# Altium PCB PCB1.PcbDoc (part 1 of 2)
Units mil, origin at the board's own origin, x right, y up, seen from the top; angles counter-clockwise.
Board outline 6000 x 4000 mil, 2 copper layers (Top Layer, Bottom Layer); 5 components, 75 nets, 178 pads, 23 vias.
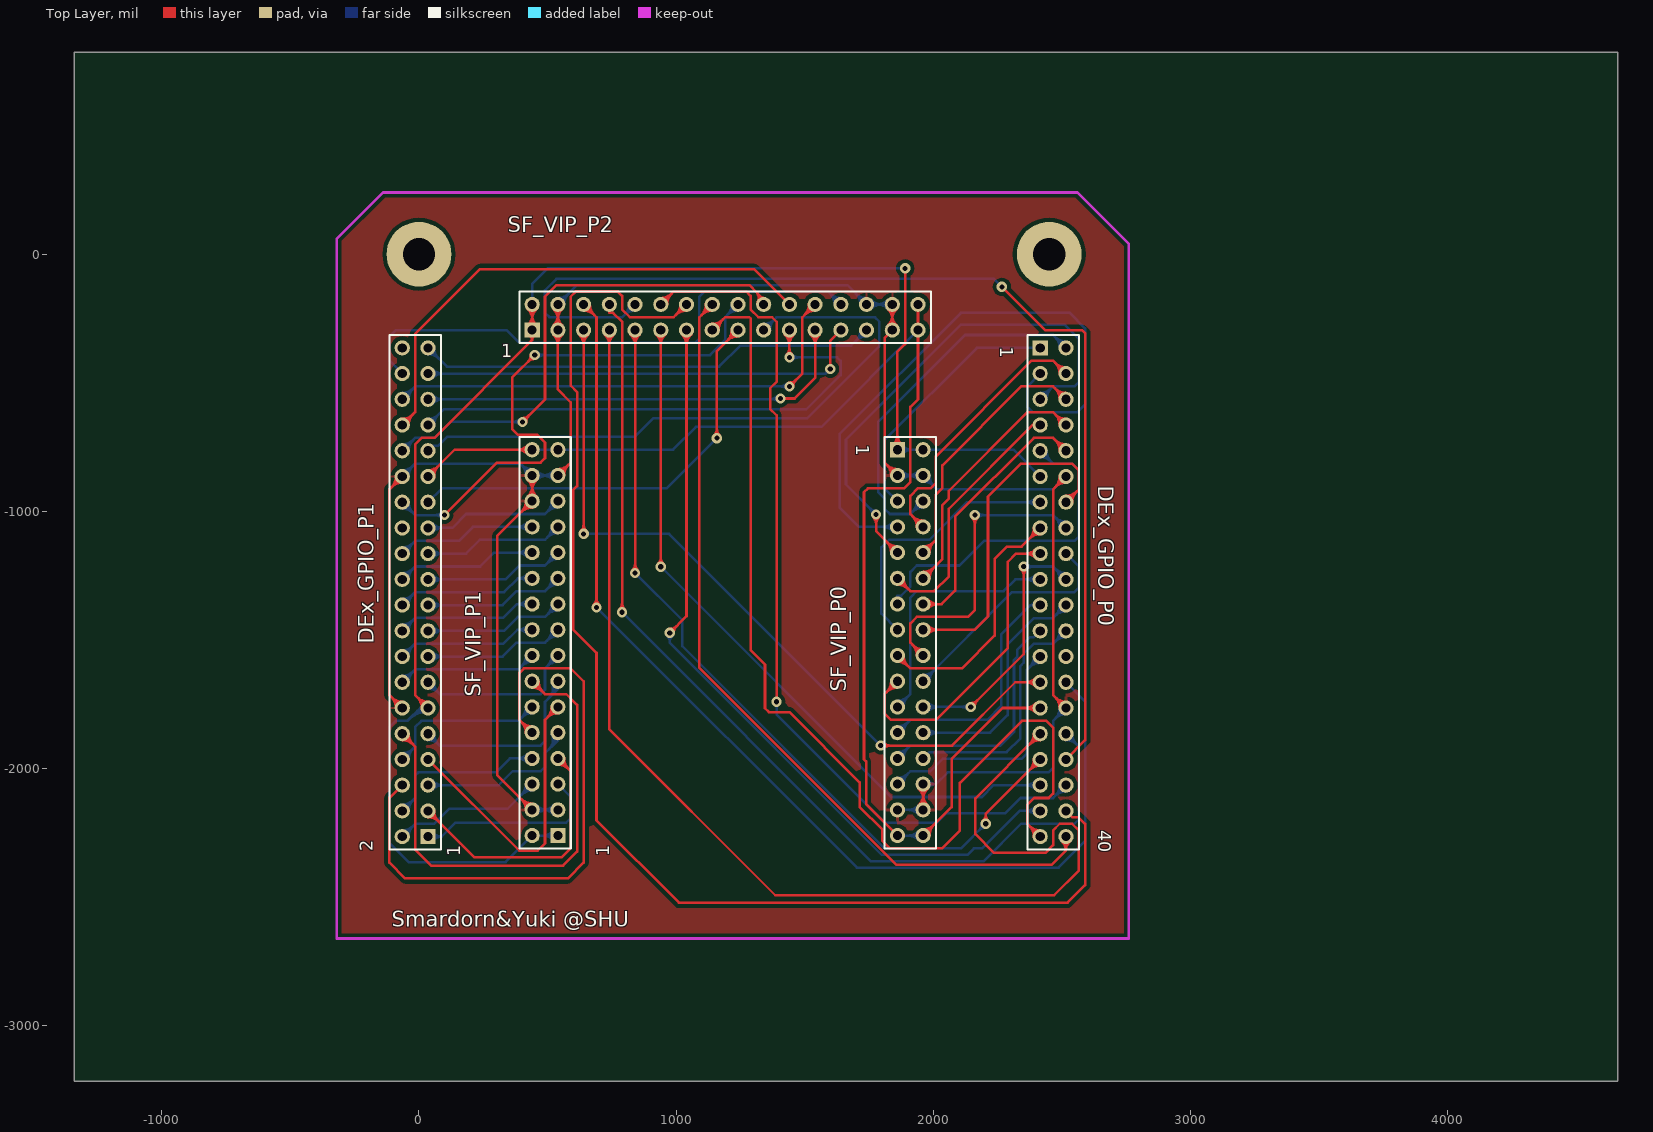
[diagram p0: Top Layer view]
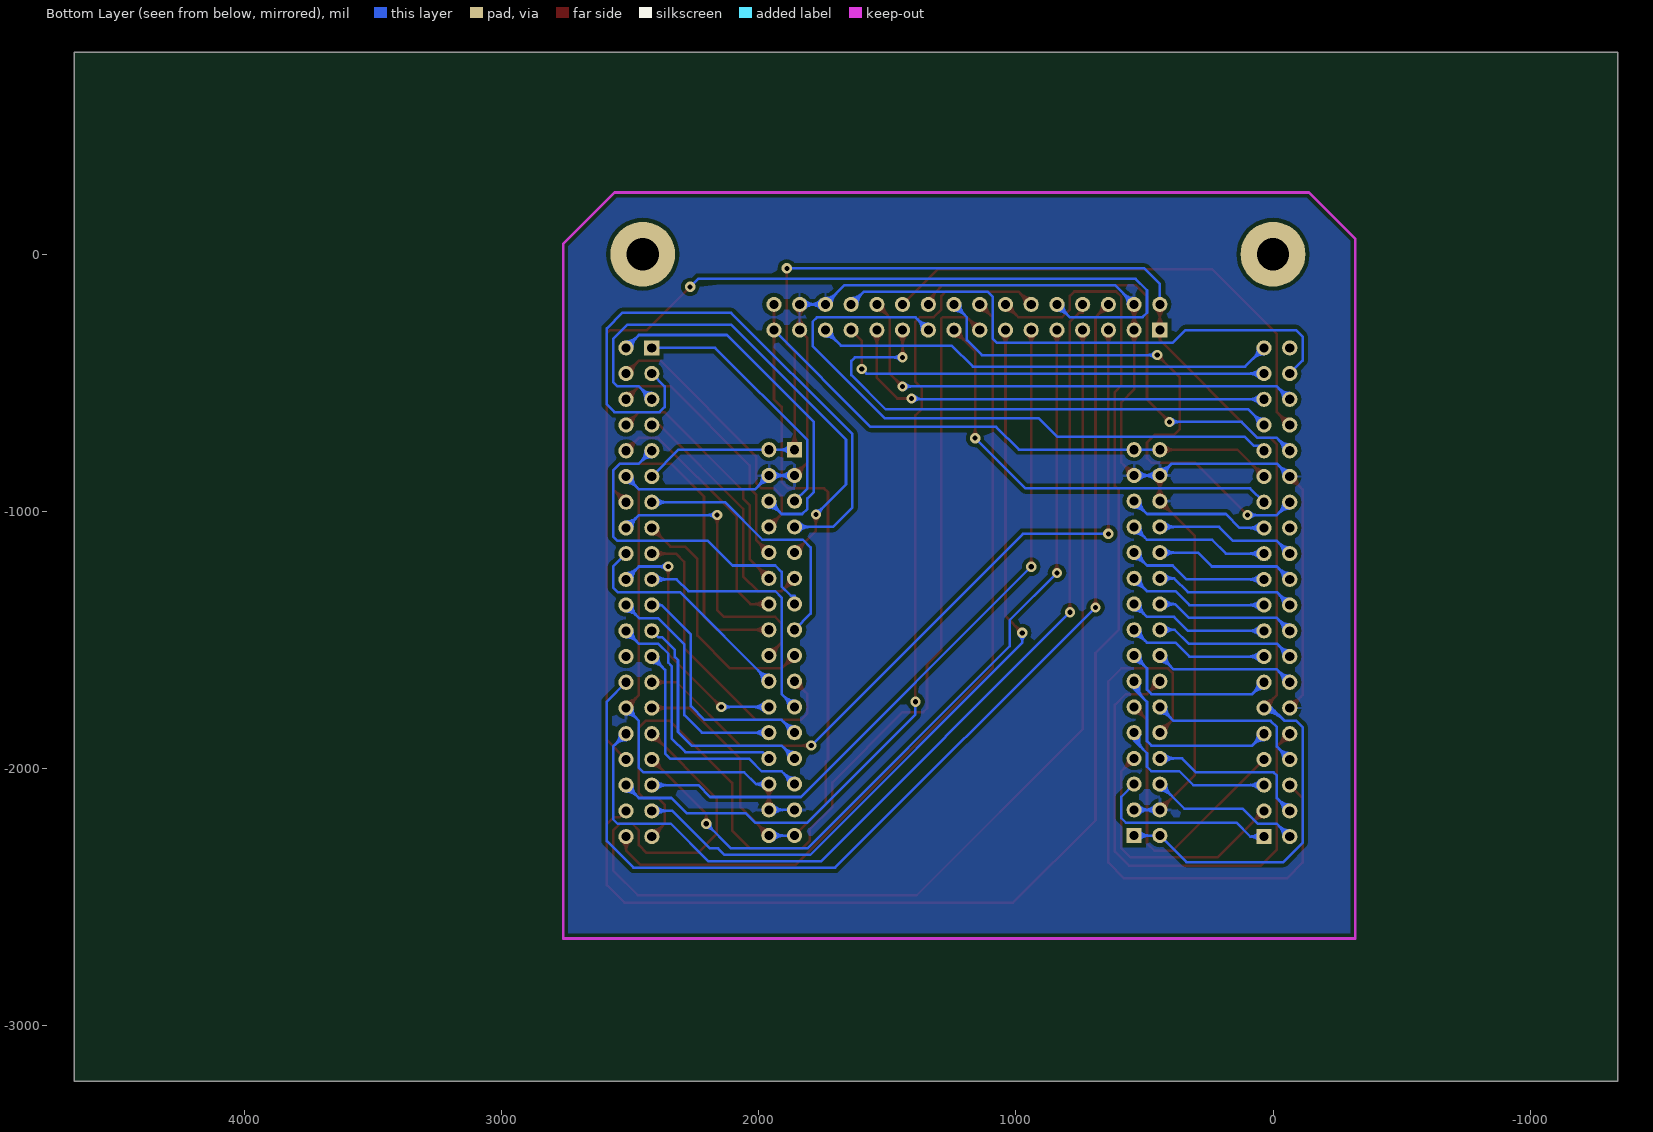
[diagram p1: Bottom Layer view, seen from below]

## Layer stack, top to bottom
Top Layer: signal copper 1.4
Dielectric: dielectric 12.6, FR-4, Dk 4.8
Bottom Layer: signal copper 1.4

## Board outline
-1340,-3215 4660,-3215 4660,785 -1340,785

## Design rules (kind name [scope] priority, off if disabled: settings)
Clearance [All] p1: gap=15
PolygonConnect [All] p1: connectstyle=Relief reliefconductorwidth=10 reliefentries=4 polygonreliefangle="90 Angle"
RoutingCorners [All] p1: cornerstyle=45-Degree minsetback=100 maxsetback=200
RoutingVias [All] p1: holewidth=20 width=40 viastyle="Through Hole" minholewidth=20 minwidth=40 maxholewidth=20 maxwidth=40
SilkscreenOverComponentPads [All] p1: minsilkscreentomaskgap=0
SolderMaskExpansion [All] p1: expansion=4
Width [All] p1: maxlimit=10 minlimit=10 preferedwidth=10
26 further rules are at their usual default settings.

## Components (designator, comment, footprint, x,y, rotation, side; value= is the part's Value field where it differs from the comment)
DEx_GPIO_P0 "Header 20X2" HDR2X20 2415,-364 r270 top locked
DEx_GPIO_P1 "Header 20X2" HDR2X20 35,-2264 r90 top locked
SF_VIP_P0 "Header 16X2" HDR2X16 1860,-760 r270 top
SF_VIP_P1 "Header 16X2" HDR2X16 540,-2260 r90 top
SF_VIP_P2 "Header 16X2" HDR2X16 440,-295 r0 top locked

## Footprints (in the part's own frame and the unit in brackets; to place one, negate y for a bottom-side part, rotate by r counter-clockwise, add the part's x,y. Pads: shape width x height; smd on the part's side, far side on the other; paste and mask are expansions set on the pad)
HDR2X16 [mm] "Connector; Header; 16x2 Position"
  rect 1.5x1.5 hole 0.9: 1(0,0)
  round 1.5 hole 0.9: 2(0,2.54) 3(2.54,0) 4(2.54,2.54) 5(5.08,0) 6(5.08,2.54) 7(7.62,0) 8(7.62,2.54) 9(10.16,0) 10(10.16,2.54) 11(12.7,0) 12(12.7,2.54) 13(15.24,0) 14(15.24,2.54) 15(17.78,0) 16(17.78,2.54) 17(20.32,0) 18(20.32,2.54) 19(22.86,0) 20(22.86,2.54) 21(25.4,0) 22(25.4,2.54) 23(27.94,0) 24(27.94,2.54) 25(30.48,0) 26(30.48,2.54) 27(33.02,0) 28(33.02,2.54) 29(35.56,0) 30(35.56,2.54) 31(38.1,0) 32(38.1,2.54)
  silkscreen extent -1.27,-1.27 39.37,3.81
HDR2X20 [mm] "Connector; Header; 20x2 Position"
  rect 1.5x1.5 hole 0.9: 1(0,0)
  round 1.5 hole 0.9: 2(0,2.54) 3(2.54,0) 4(2.54,2.54) 5(5.08,0) 6(5.08,2.54) 7(7.62,0) 8(7.62,2.54) 9(10.16,0) 10(10.16,2.54) 11(12.7,0) 12(12.7,2.54) 13(15.24,0) 14(15.24,2.54) 15(17.78,0) 16(17.78,2.54) 17(20.32,0) 18(20.32,2.54) 19(22.86,0) 20(22.86,2.54) 21(25.4,0) 22(25.4,2.54) 23(27.94,0) 24(27.94,2.54) 25(30.48,0) 26(30.48,2.54) 27(33.02,0) 28(33.02,2.54) 29(35.56,0) 30(35.56,2.54) 31(38.1,0) 32(38.1,2.54) 33(40.64,0) 34(40.64,2.54) 35(43.18,0) 36(43.18,2.54) 37(45.72,0) 38(45.72,2.54) 39(48.26,0) 40(48.26,2.54)
  silkscreen extent -1.27,-1.27 49.53,3.81

## Part data
DEx_GPIO_P0 DEx_GPIO_P1: "Header, 20-Pin, Dual row"
SF_VIP_P0 SF_VIP_P1 SF_VIP_P2: "Header, 16-Pin, Dual row"

## Free pads (board coordinates)
  round 252 hole 126: 1(0,0) 2(2450,0)

## Via types
v1: diameter 40, hole 20, Top Layer to Bottom Layer, 23 vias

## Nets (pads, with @x,y where several pads share a name; then routed paths per layer and width w, separated by ;. In a path a pad name is that pad's centre, name@x,y a point inside that pad or via, vN(x,y) a via of type N, cw(c..) or ccw(c..) an arc to the next point about the centre after c; other vN are vias at no path point)
DC3.3V: DEx_GPIO_P0.29 DEx_GPIO_P1.29 SF_VIP_P0.31 SF_VIP_P0.32 SF_VIP_P1.31 SF_VIP_P1.32 SF_VIP_P2.31 SF_VIP_P2.32 | length 6039.1
  Top Layer w10: DEx_GPIO_P1.29@35,-864 139,-760 SF_VIP_P1.32@440,-760 ; DEx_GPIO_P1.29@35,-849.47 ccw(c35,-814.4) 59.8,-839.2 ccw(c84.6,-864) DEx_GPIO_P1.29@49.53,-864 ; DEx_GPIO_P1.29@35,-839.47 ccw(c35,-780.26) 76.87,-822.13 ccw(c118.74,-864) DEx_GPIO_P1.29@59.53,-864 ; SF_VIP_P1.32@422.66,-777.34 ccw(c380.79,-819.21) 380.79,-760 ccw(c380.79,-700.79) SF_VIP_P1.32@422.66,-742.66 ; SF_VIP_P1.32@429.73,-770.27 ccw(c404.93,-795.07) 404.93,-760 ccw(c404.93,-724.93) SF_VIP_P1.32@429.73,-749.73 ; SF_VIP_P0.31@1860,-2260 1738,-2138 1738,-1972.12 1730,-1964.12 1730,-925 1745,-910 1885,-910 1910,-885 1910,-594 1940,-564 SF_VIP_P2.31@1940,-295 SF_VIP_P2.32@1940,-195 ; SF_VIP_P0.32@1960,-2260 2071,-2149 2071,-1962 2269,-1764 DEx_GPIO_P0.29@2415,-1764 ; SF_VIP_P0.32@1960,-2245.47 ccw(c1960,-2210.4) 1984.8,-2235.2 ccw(c2009.6,-2260) SF_VIP_P0.32@1974.53,-2260 ; SF_VIP_P0.32@1960,-2235.47 ccw(c1960,-2176.26) 2001.87,-2218.13 ccw(c2043.74,-2260) SF_VIP_P0.32@1984.53,-2260 ; DEx_GPIO_P0.29@2397.66,-1781.34 ccw(c2355.79,-1823.21) 2355.79,-1764 ccw(c2355.79,-1704.79) DEx_GPIO_P0.29@2397.66,-1746.66 ; DEx_GPIO_P0.29@2404.73,-1774.27 ccw(c2379.93,-1799.07) 2379.93,-1764 ccw(c2379.93,-1728.93) DEx_GPIO_P0.29@2404.73,-1753.73
  Bottom Layer w10: SF_VIP_P1.32@440,-760 SF_VIP_P1.31@540,-760 988,-760 1077,-671 1564,-671 SF_VIP_P2.31@1940,-295 ; SF_VIP_P0.31@1860,-2260 SF_VIP_P0.32@1960,-2260 ; SF_VIP_P0.32@1942.66,-2277.34 ccw(c1900.79,-2319.21) 1900.79,-2260 ccw(c1900.79,-2200.79) SF_VIP_P0.32@1942.66,-2242.66 ; SF_VIP_P0.32@1949.73,-2270.27 ccw(c1924.93,-2295.07) 1924.93,-2260 ccw(c1924.93,-2224.93) SF_VIP_P0.32@1949.73,-2249.73
DC5.0V: DEx_GPIO_P0.11 DEx_GPIO_P1.11 SF_VIP_P0.1 SF_VIP_P0.2 SF_VIP_P1.1 SF_VIP_P1.2 SF_VIP_P2.1 SF_VIP_P2.2 | length 7163.8
  Top Layer w10: DEx_GPIO_P1.11@10.47,-1764 ccw(c-48.74,-1764) -6.87,-1722.13 ccw(c35,-1680.26) DEx_GPIO_P1.11@35,-1739.47 ; DEx_GPIO_P1.11@20.47,-1764 ccw(c-14.6,-1764) 10.2,-1739.2 ccw(c35,-1714.4) DEx_GPIO_P1.11@35,-1749.47 ; DEx_GPIO_P1.11@35,-1764 -15,-1714 -15,-739 10,-714 60,-714 440,-334 ; SF_VIP_P2.1@422.66,-277.66 ccw(c380.79,-235.79) 440,-235.79 ccw(c499.21,-235.79) SF_VIP_P2.1@457.34,-277.66 ; SF_VIP_P2.2@422.66,-212.34 cw(c380.79,-254.21) 440,-254.21 cw(c499.21,-254.21) SF_VIP_P2.2@457.34,-212.34 ; SF_VIP_P2.1@429.38,-317.11 cw(c421.26,-334) 440,-334 ; SF_VIP_P2.1@429.73,-284.73 ccw(c404.93,-259.93) 440,-259.93 ccw(c475.07,-259.93) SF_VIP_P2.1@450.27,-284.73 ; SF_VIP_P2.2@429.73,-205.27 cw(c404.93,-230.07) 440,-230.07 cw(c475.07,-230.07) SF_VIP_P2.2@450.27,-205.27 ; SF_VIP_P2.2@440,-195 SF_VIP_P2.1@440,-295 440,-334 ; SF_VIP_P2.1@450.62,-317.11 ccw(c458.74,-334) 440,-334 ; SF_VIP_P0.1@1842.66,-742.66 ccw(c1800.79,-700.79) 1860,-700.79 ccw(c1919.21,-700.79) SF_VIP_P0.1@1877.34,-742.66 ; SF_VIP_P0.1@1849.73,-749.73 ccw(c1824.93,-724.93) 1860,-724.93 ccw(c1895.07,-724.93) SF_VIP_P0.1@1870.27,-749.73 ; SF_VIP_P0.1@1860,-760 1860,-379 1890,-349 v1(1890,-55)
  Bottom Layer w10: -40.94,-1809.98 cw(c35,-1885.92) DEx_GPIO_P1.11@35,-1778.53 ; -23.87,-1792.91 cw(c35,-1851.78) DEx_GPIO_P1.11@35,-1768.53 ; -6.8,-1775.84 cw(c35,-1817.64) DEx_GPIO_P1.11@35,-1758.53 ; DEx_GPIO_P1.11@35,-1764 5.04,-1764 -44.48,-1813.53 -90,-1813.53 -115,-1838.53 -115,-2288 -40,-2363 337,-2363 SF_VIP_P1.2@440,-2260 SF_VIP_P1.1@540,-2260 ; SF_VIP_P2.2@440,-195 440,-115 500,-55 v1(1890,-55) ; SF_VIP_P1.1@522.66,-2277.34 ccw(c480.79,-2319.21) 480.79,-2260 ccw(c480.79,-2200.79) SF_VIP_P1.1@522.66,-2242.66 ; SF_VIP_P1.1@529.73,-2270.27 ccw(c504.93,-2295.07) 504.93,-2260 ccw(c504.93,-2224.93) SF_VIP_P1.1@529.73,-2249.73 ; SF_VIP_P0.1@1860,-760 SF_VIP_P0.2@1960,-760 2311,-760 DEx_GPIO_P0.11@2415,-864 ; SF_VIP_P0.1@1870.27,-770.27 cw(c1895.07,-795.07) 1895.07,-760 cw(c1895.07,-724.93) SF_VIP_P0.1@1870.27,-749.73 ; SF_VIP_P0.1@1877.34,-777.34 cw(c1919.21,-819.21) 1919.21,-760 cw(c1919.21,-700.79) SF_VIP_P0.1@1877.34,-742.66
GND: DEx_GPIO_P0.12 DEx_GPIO_P0.30 DEx_GPIO_P1.12 DEx_GPIO_P1.30 SF_VIP_P0.3 SF_VIP_P0.4 SF_VIP_P0.28 SF_VIP_P0.29 SF_VIP_P0.30 SF_VIP_P1.3 SF_VIP_P1.4 SF_VIP_P1.28 SF_VIP_P1.29 SF_VIP_P1.30 SF_VIP_P2.3 SF_VIP_P2.4 SF_VIP_P2.28 SF_VIP_P2.29 SF_VIP_P2.30 | length 13446.1
  Top Layer w10: DEx_GPIO_P1.12@-89.53,-1764 ccw(c-148.74,-1764) -106.87,-1722.13 ccw(c-65,-1680.26) DEx_GPIO_P1.12@-65,-1739.47 ; DEx_GPIO_P1.30@-89.53,-864 cw(c-148.74,-864) -106.87,-905.87 cw(c-65,-947.74) DEx_GPIO_P1.30@-65,-888.53 ; DEx_GPIO_P1.12@-79.53,-1764 ccw(c-114.6,-1764) -89.8,-1739.2 ccw(c-65,-1714.4) DEx_GPIO_P1.12@-65,-1749.47 ; DEx_GPIO_P1.30@-79.53,-864 cw(c-114.6,-864) -89.8,-888.8 cw(c-65,-913.6) DEx_GPIO_P1.30@-65,-878.53 ; DEx_GPIO_P1.12@-65,-1764 -115,-1714 -115,-914 DEx_GPIO_P1.30@-65,-864 ; SF_VIP_P1.4@415.47,-2160 ccw(c356.26,-2160) 398.13,-2118.13 ccw(c440,-2076.26) SF_VIP_P1.4@440,-2135.47 ; SF_VIP_P1.28@415.47,-960 cw(c356.26,-960) 398.13,-1001.87 cw(c440,-1043.74) SF_VIP_P1.28@440,-984.53 ; SF_VIP_P1.28@422.66,-942.66 ccw(c380.79,-900.79) 440,-900.79 ccw(c499.21,-900.79) SF_VIP_P1.28@457.34,-942.66 ; SF_VIP_P1.30@422.66,-877.34 cw(c380.79,-919.21) 440,-919.21 cw(c499.21,-919.21) SF_VIP_P1.30@457.34,-877.34 ; SF_VIP_P1.4@425.47,-2160 ccw(c390.4,-2160) 415.2,-2135.2 ccw(c440,-2110.4) SF_VIP_P1.4@440,-2145.47 ; SF_VIP_P1.28@425.47,-960 cw(c390.4,-960) 415.2,-984.8 cw(c440,-1009.6) SF_VIP_P1.28@440,-974.53 ; SF_VIP_P1.28@429.73,-949.73 ccw(c404.93,-924.93) 440,-924.93 ccw(c475.07,-924.93) SF_VIP_P1.28@450.27,-949.73 ; SF_VIP_P1.30@429.73,-870.27 cw(c404.93,-895.07) 440,-895.07 cw(c475.07,-895.07) SF_VIP_P1.30@450.27,-870.27 ; SF_VIP_P1.4@440,-2160 304,-2024 304,-1096 SF_VIP_P1.28@440,-960 SF_VIP_P1.30@440,-860 ; SF_VIP_P2.3@522.66,-312.34 cw(c480.79,-354.21) 540,-354.21 cw(c599.21,-354.21) SF_VIP_P2.3@557.34,-312.34 ; SF_VIP_P2.3@522.66,-277.66 ccw(c480.79,-235.79) 540,-235.79 ccw(c599.21,-235.79) SF_VIP_P2.3@557.34,-277.66 ; SF_VIP_P2.4@522.66,-212.34 cw(c480.79,-254.21) 540,-254.21 cw(c599.21,-254.21) SF_VIP_P2.4@557.34,-212.34 ; SF_VIP_P2.3@529.73,-305.27 cw(c504.93,-330.07) 540,-330.07 cw(c575.07,-330.07) SF_VIP_P2.3@550.27,-305.27 ; SF_VIP_P2.3@529.73,-284.73 ccw(c504.93,-259.93) 540,-259.93 ccw(c575.07,-259.93) SF_VIP_P2.3@550.27,-284.73 ; SF_VIP_P2.4@529.73,-205.27 cw(c504.93,-230.07) 540,-230.07 cw(c575.07,-230.07) SF_VIP_P2.4@550.27,-205.27 ; SF_VIP_P1.29@540,-860 590,-810 590,-575.67 540,-525.67 SF_VIP_P2.3@540,-295 SF_VIP_P2.4@540,-195 ; SF_VIP_P1.29@540,-845.47 ccw(c540,-810.4) 564.8,-835.2 ccw(c589.6,-860) SF_VIP_P1.29@554.53,-860 ; SF_VIP_P1.29@540,-835.47 ccw(c540,-776.26) 581.87,-818.13 ccw(c623.74,-860) SF_VIP_P1.29@564.53,-860 ; SF_VIP_P2.29@1822.66,-277.66 ccw(c1780.79,-235.79) 1840,-235.79 ccw(c1899.21,-235.79) SF_VIP_P2.29@1857.34,-277.66 ; SF_VIP_P2.30@1822.66,-212.34 cw(c1780.79,-254.21) 1840,-254.21 cw(c1899.21,-254.21) SF_VIP_P2.30@1857.34,-212.34 ; SF_VIP_P2.29@1829.73,-284.73 ccw(c1804.93,-259.93) 1840,-259.93 ccw(c1875.07,-259.93) SF_VIP_P2.29@1850.27,-284.73 ; SF_VIP_P2.30@1829.73,-205.27 cw(c1804.93,-230.07) 1840,-230.07 cw(c1875.07,-230.07) SF_VIP_P2.30@1850.27,-205.27 ; SF_VIP_P0.3@1835.47,-860 ccw(c1776.26,-860) 1818.13,-818.13 ccw(c1860,-776.26) SF_VIP_P0.3@1860,-835.47 ; SF_VIP_P2.30@1840,-195 SF_VIP_P2.29@1840,-295 1810,-325 1810,-810 SF_VIP_P0.3@1860,-860 ; SF_VIP_P0.3@1845.47,-860 ccw(c1810.4,-860) 1835.2,-835.2 ccw(c1860,-810.4) SF_VIP_P0.3@1860,-845.47 ; SF_VIP_P0.30@1942.66,-2142.66 ccw(c1900.79,-2100.79) 1960,-2100.79 ccw(c2019.21,-2100.79) SF_VIP_P0.30@1977.34,-2142.66 ; SF_VIP_P0.28@1942.66,-2077.34 cw(c1900.79,-2119.21) 1960,-2119.21 cw(c2019.21,-2119.21) SF_VIP_P0.28@1977.34,-2077.34 ; SF_VIP_P0.30@1949.73,-2149.73 ccw(c1924.93,-2124.93) 1960,-2124.93 ccw(c1995.07,-2124.93) SF_VIP_P0.30@1970.27,-2149.73 ; SF_VIP_P0.28@1949.73,-2070.27 cw(c1924.93,-2095.07) 1960,-2095.07 cw(c1995.07,-2095.07) SF_VIP_P0.28@1970.27,-2070.27 ; SF_VIP_P0.30@1960,-2160 SF_VIP_P0.28@1960,-2060 ; DEx_GPIO_P0.30@2490.47,-1764 ccw(c2431.26,-1764) 2473.13,-1722.13 ccw(c2515,-1680.26) DEx_GPIO_P0.30@2515,-1739.47 ; DEx_GPIO_P0.12@2490.47,-864 cw(c2431.26,-864) 2473.13,-905.87 cw(c2515,-947.74) DEx_GPIO_P0.12@2515,-888.53 ; DEx_GPIO_P0.30@2500.47,-1764 ccw(c2465.4,-1764) 2490.2,-1739.2 ccw(c2515,-1714.4) DEx_GPIO_P0.30@2515,-1749.47 ; DEx_GPIO_P0.12@2500.47,-864 cw(c2465.4,-864) 2490.2,-888.8 cw(c2515,-913.6) DEx_GPIO_P0.12@2515,-878.53 ; DEx_GPIO_P0.30@2515,-1764 2465,-1714 2465,-914 DEx_GPIO_P0.12@2515,-864
  Bottom Layer w10: DEx_GPIO_P1.30@-65,-864 -15,-814 394,-814 SF_VIP_P1.30@440,-860 SF_VIP_P1.29@540,-860 ; DEx_GPIO_P1.30@-65,-849.47 ccw(c-65,-814.4) -40.2,-839.2 ccw(c-15.4,-864) DEx_GPIO_P1.30@-50.47,-864 ; DEx_GPIO_P1.30@-65,-839.47 ccw(c-65,-780.26) -23.13,-822.13 ccw(c18.74,-864) DEx_GPIO_P1.30@-40.47,-864 ; SF_VIP_P1.30@415.47,-860 ccw(c356.26,-860) 398.13,-818.13 ccw(c440,-776.26) SF_VIP_P1.30@440,-835.47 ; SF_VIP_P1.30@425.47,-860 ccw(c390.4,-860) 415.2,-835.2 ccw(c440,-810.4) SF_VIP_P1.30@440,-845.47 ; SF_VIP_P1.4@440,-2160 SF_VIP_P1.3@540,-2160 ; SF_VIP_P1.4@450.27,-2170.27 cw(c475.07,-2195.07) 475.07,-2160 cw(c475.07,-2124.93) SF_VIP_P1.4@450.27,-2149.73 ; SF_VIP_P1.30@450.27,-870.27 cw(c475.07,-895.07) 475.07,-860 cw(c475.07,-824.93) SF_VIP_P1.30@450.27,-849.73 ; SF_VIP_P1.4@457.34,-2177.34 cw(c499.21,-2219.21) 499.21,-2160 cw(c499.21,-2100.79) SF_VIP_P1.4@457.34,-2142.66 ; SF_VIP_P1.30@457.34,-877.34 cw(c499.21,-919.21) 499.21,-860 cw(c499.21,-800.79) SF_VIP_P1.30@457.34,-842.66 ; SF_VIP_P1.3@522.66,-2177.34 ccw(c480.79,-2219.21) 480.79,-2160 ccw(c480.79,-2100.79) SF_VIP_P1.3@522.66,-2142.66 ; SF_VIP_P1.29@522.66,-877.34 ccw(c480.79,-919.21) 480.79,-860 ccw(c480.79,-800.79) SF_VIP_P1.29@522.66,-842.66 ; SF_VIP_P1.3@529.73,-2170.27 ccw(c504.93,-2195.07) 504.93,-2160 ccw(c504.93,-2124.93) SF_VIP_P1.3@529.73,-2149.73 ; SF_VIP_P1.29@529.73,-870.27 ccw(c504.93,-895.07) 504.93,-860 ccw(c504.93,-824.93) SF_VIP_P1.29@529.73,-849.73 ; SF_VIP_P2.4@540,-195 614.53,-120.47 1665.47,-120.47 SF_VIP_P2.28@1740,-195 SF_VIP_P2.30@1840,-195 ; SF_VIP_P2.4@540,-180.47 ccw(c540,-145.4) 564.8,-170.2 ccw(c589.6,-195) SF_VIP_P2.4@554.53,-195 ; SF_VIP_P2.4@540,-170.47 ccw(c540,-111.26) 581.87,-153.13 ccw(c623.74,-195) SF_VIP_P2.4@564.53,-195 ; SF_VIP_P2.28@1715.47,-195 ccw(c1656.26,-195) 1698.13,-153.13 ccw(c1740,-111.26) SF_VIP_P2.28@1740,-170.47 ; SF_VIP_P2.28@1725.47,-195 ccw(c1690.4,-195) 1715.2,-170.2 ccw(c1740,-145.4) SF_VIP_P2.28@1740,-180.47 ; SF_VIP_P2.28@1750.27,-205.27 cw(c1775.07,-230.07) 1775.07,-195 cw(c1775.07,-159.93) SF_VIP_P2.28@1750.27,-184.73 ; SF_VIP_P2.28@1757.34,-212.34 cw(c1799.21,-254.21) 1799.21,-195 cw(c1799.21,-135.79) SF_VIP_P2.28@1757.34,-177.66 ; SF_VIP_P2.30@1822.66,-212.34 ccw(c1780.79,-254.21) 1780.79,-195 ccw(c1780.79,-135.79) SF_VIP_P2.30@1822.66,-177.66 ; SF_VIP_P2.30@1829.73,-205.27 ccw(c1804.93,-230.07) 1804.93,-195 ccw(c1804.93,-159.93) SF_VIP_P2.30@1829.73,-184.73 ; SF_VIP_P0.29@1860,-2160 SF_VIP_P0.30@1960,-2160 ; SF_VIP_P0.3@1860,-860 SF_VIP_P0.4@1960,-860 2014,-914 2465,-914 DEx_GPIO_P0.12@2515,-864 ; SF_VIP_P0.3@1870.27,-870.27 cw(c1895.07,-895.07) 1895.07,-860 cw(c1895.07,-824.93) SF_VIP_P0.3@1870.27,-849.73 ; SF_VIP_P0.3@1877.34,-877.34 cw(c1919.21,-919.21) 1919.21,-860 cw(c1919.21,-800.79) SF_VIP_P0.3@1877.34,-842.66 ; SF_VIP_P0.30@1942.66,-2177.34 ccw(c1900.79,-2219.21) 1900.79,-2160 ccw(c1900.79,-2100.79) SF_VIP_P0.30@1942.66,-2142.66 ; SF_VIP_P0.4@1942.66,-877.34 ccw(c1900.79,-919.21) 1900.79,-860 ccw(c1900.79,-800.79) SF_VIP_P0.4@1942.66,-842.66 ; SF_VIP_P0.30@1949.73,-2170.27 ccw(c1924.93,-2195.07) 1924.93,-2160 ccw(c1924.93,-2124.93) SF_VIP_P0.30@1949.73,-2149.73 ; SF_VIP_P0.4@1949.73,-870.27 ccw(c1924.93,-895.07) 1924.93,-860 ccw(c1924.93,-824.93) SF_VIP_P0.4@1949.73,-849.73 ; SF_VIP_P0.28@1960,-2060 2009.53,-2060 ; SF_VIP_P0.4@1960,-884.53 cw(c1960,-943.74) 2001.87,-901.87 cw(c2043.74,-860) SF_VIP_P0.4@1984.53,-860 ; SF_VIP_P0.4@1960,-874.53 cw(c1960,-909.6) 1984.8,-884.8 cw(c2009.6,-860) SF_VIP_P0.4@1974.53,-860 ; SF_VIP_P0.28@1979.51,-2074.87 cw(c2009.53,-2097.74) 2009.53,-2060 ; SF_VIP_P0.28@1979.51,-2045.13 ccw(c2009.53,-2022.26) 2009.53,-2060 ; DEx_GPIO_P0.30@2490.47,-1764 cw(c2431.26,-1764) 2473.13,-1805.87 cw(c2515,-1847.74) DEx_GPIO_P0.30@2515,-1788.53 ; DEx_GPIO_P0.12@2490.47,-864 cw(c2431.26,-864) 2473.13,-905.87 cw(c2515,-947.74) DEx_GPIO_P0.12@2515,-888.53 ; DEx_GPIO_P0.30@2500.47,-1764 cw(c2465.4,-1764) 2490.2,-1788.8 cw(c2515,-1813.6) DEx_GPIO_P0.30@2515,-1778.53 ; DEx_GPIO_P0.12@2500.47,-864 cw(c2465.4,-864) 2490.2,-888.8 cw(c2515,-913.6) DEx_GPIO_P0.12@2515,-878.53 ; DEx_GPIO_P0.30@2515,-1764 2465,-1814 2465,-1996.5 2447.5,-2014 2055.53,-2014 2009.53,-2060
GPIO_0_0: DEx_GPIO_P0.1 SF_VIP_P0.5 | length 1011.7
  Bottom Layer w10: SF_VIP_P0.5@1860,-960 1810,-910 1810,-722.5 2168.5,-364 DEx_GPIO_P0.1@2415,-364
GPIO_0_1: DEx_GPIO_P0.2 SF_VIP_P0.6 | length 1714
  Bottom Layer w10: SF_VIP_P0.6@1935.47,-960 cw(c1876.26,-960) 1918.13,-1001.87 cw(c1960,-1043.74) SF_VIP_P0.6@1960,-984.53 ; SF_VIP_P0.6@1945.47,-960 cw(c1910.4,-960) 1935.2,-984.8 cw(c1960,-1009.6) SF_VIP_P0.6@1960,-974.53 ; SF_VIP_P0.6@1960,-960 1910,-1010 1830.47,-1010 1810.47,-990 1810.47,-948.97 1785,-923.5 1785,-652 2123,-314 2465,-314 DEx_GPIO_P0.2@2515,-364 ; DEx_GPIO_P0.2@2490.47,-364 ccw(c2431.26,-364) 2473.13,-322.13 ccw(c2515,-280.26) DEx_GPIO_P0.2@2515,-339.47 ; DEx_GPIO_P0.2@2500.47,-364 ccw(c2465.4,-364) 2490.2,-339.2 ccw(c2515,-314.4) DEx_GPIO_P0.2@2515,-349.47
GPIO_0_2: DEx_GPIO_P0.3 SF_VIP_P0.7 | length 2557.2
  Bottom Layer w10: SF_VIP_P0.7@1842.66,-1077.34 ccw(c1800.79,-1119.21) 1800.79,-1060 ccw(c1800.79,-1000.79) SF_VIP_P0.7@1842.66,-1042.66 ; SF_VIP_P0.7@1849.73,-1070.27 ccw(c1824.93,-1095.07) 1824.93,-1060 ccw(c1824.93,-1024.93) SF_VIP_P0.7@1849.73,-1049.73 ; SF_VIP_P0.7@1860,-1060 1710,-1060 1635,-985 1635,-699.53 2106.53,-228 2530,-228 2590,-288 2590,-584 2560,-614 2385,-614 2365,-594 2365,-514 DEx_GPIO_P0.3@2415,-464
GPIO_0_3: DEx_GPIO_P0.4 SF_VIP_P0.8 | length 1341.2
  Top Layer w10: SF_VIP_P0.8@1935.47,-1060 ccw(c1876.26,-1060) 1918.13,-1018.13 ccw(c1960,-976.26) SF_VIP_P0.8@1960,-1035.47 ; SF_VIP_P0.8@1945.47,-1060 ccw(c1910.4,-1060) 1935.2,-1035.2 ccw(c1960,-1010.4) SF_VIP_P0.8@1960,-1045.47 ; SF_VIP_P0.8@1960,-1060 1910,-1010 1910,-939.96 1940.43,-909.53 1990,-909.53 2009.53,-890 2009.53,-786.47 2382,-414 2465,-414 DEx_GPIO_P0.4@2515,-464 ; DEx_GPIO_P0.4@2490.47,-464 ccw(c2431.26,-464) 2473.13,-422.13 ccw(c2515,-380.26) DEx_GPIO_P0.4@2515,-439.47 ; DEx_GPIO_P0.4@2500.47,-464 ccw(c2465.4,-464) 2490.2,-439.2 ccw(c2515,-414.4) DEx_GPIO_P0.4@2515,-449.47
GPIO_0_4: DEx_GPIO_P0.5 SF_VIP_P0.9 | length 2390.6
  Top Layer w10: v1@1766.21,-1022.61 cw(c1740.61,-1048.21) 1776.82,-1048.21 cw(c1813.03,-1048.21) v1@1787.43,-1022.61 ; v1(1776.82,-1012) 1776.82,-1076.82 SF_VIP_P0.9@1860,-1160 ; SF_VIP_P0.9@1835.47,-1160 ccw(c1776.26,-1160) 1818.13,-1118.13 ccw(c1860,-1076.26) SF_VIP_P0.9@1860,-1135.47 ; SF_VIP_P0.9@1845.47,-1160 ccw(c1810.4,-1160) 1835.2,-1135.2 ccw(c1860,-1110.4) SF_VIP_P0.9@1860,-1145.47
  Bottom Layer w10: v1@1761.82,-1012 ccw(c1725.61,-1012) 1751.21,-986.39 ccw(c1776.82,-960.79) v1@1776.82,-997 ; v1(1776.82,-1012) 1660,-895.18 1660,-720.33 2106.33,-274 2510,-274 2565,-329 2565,-496.5 2547.5,-514 2465,-514 DEx_GPIO_P0.5@2415,-564 ; DEx_GPIO_P0.5@2415,-549.47 ccw(c2415,-514.4) 2439.8,-539.2 ccw(c2464.6,-564) DEx_GPIO_P0.5@2429.53,-564 ; DEx_GPIO_P0.5@2415,-539.47 ccw(c2415,-480.26) 2456.87,-522.13 ccw(c2498.74,-564) DEx_GPIO_P0.5@2439.53,-564
GPIO_0_5: DEx_GPIO_P0.6 SF_VIP_P0.10 | length 1294.7
  Top Layer w10: SF_VIP_P0.10@1960,-1160 2009.53,-1110.47 2009.53,-934.53 2034.53,-909.53 2034.53,-820.47 2341,-514 2465,-514 DEx_GPIO_P0.6@2515,-564 ; SF_VIP_P0.10@1960,-1145.47 ccw(c1960,-1110.4) 1984.8,-1135.2 ccw(c2009.6,-1160) SF_VIP_P0.10@1974.53,-1160 ; SF_VIP_P0.10@1960,-1135.47 ccw(c1960,-1076.26) 2001.87,-1118.13 ccw(c2043.74,-1160) SF_VIP_P0.10@1984.53,-1160 ; DEx_GPIO_P0.6@2490.47,-564 ccw(c2431.26,-564) 2473.13,-522.13 ccw(c2515,-480.26) DEx_GPIO_P0.6@2515,-539.47 ; DEx_GPIO_P0.6@2500.47,-564 ccw(c2465.4,-564) 2490.2,-539.2 ccw(c2515,-514.4) DEx_GPIO_P0.6@2515,-549.47
GPIO_0_6: DEx_GPIO_P0.7 SF_VIP_P0.11 | length 1145.5
  Top Layer w10: SF_VIP_P0.11@1860,-1284.53 cw(c1860,-1343.74) 1901.87,-1301.87 cw(c1943.74,-1260) SF_VIP_P0.11@1884.53,-1260 ; SF_VIP_P0.11@1860,-1274.53 cw(c1860,-1309.6) 1884.8,-1284.8 cw(c1909.6,-1260) SF_VIP_P0.11@1874.53,-1260 ; SF_VIP_P0.11@1860,-1260 1910,-1310 2002,-1310 2059.53,-1252.47 2059.53,-989.47 2385,-664 DEx_GPIO_P0.7@2415,-664
GPIO_0_7: DEx_GPIO_P0.8 SF_VIP_P0.12 | length 1280.7
  Top Layer w10: SF_VIP_P0.12@1960,-1260 2034.53,-1185.47 2034.53,-975.43 2059.53,-950.43 2059.53,-919.47 2365,-614 2465,-614 DEx_GPIO_P0.8@2515,-664 ; SF_VIP_P0.12@1960,-1245.47 ccw(c1960,-1210.4) 1984.8,-1235.2 ccw(c2009.6,-1260) SF_VIP_P0.12@1974.53,-1260 ; SF_VIP_P0.12@1960,-1235.47 ccw(c1960,-1176.26) 2001.87,-1218.13 ccw(c2043.74,-1260) SF_VIP_P0.12@1984.53,-1260 ; DEx_GPIO_P0.8@2490.47,-664 ccw(c2431.26,-664) 2473.13,-622.13 ccw(c2515,-580.26) DEx_GPIO_P0.8@2515,-639.47 ; DEx_GPIO_P0.8@2500.47,-664 ccw(c2465.4,-664) 2490.2,-639.2 ccw(c2515,-614.4) DEx_GPIO_P0.8@2515,-649.47
GPIO_0_8: DEx_GPIO_P0.9 SF_VIP_P0.13 | length 1452.8
  Bottom Layer w10: SF_VIP_P0.13@1860,-1360 1860,-1327 1874.75,-1327 1910,-1291.75 1910,-1235 1935,-1210 2101,-1210 2197,-1114 2547.5,-1114 2565,-1096.5 2565,-840 2539,-814 2465,-814 DEx_GPIO_P0.9@2415,-764 ; DEx_GPIO_P0.9@2415,-788.53 cw(c2415,-847.74) 2456.87,-805.87 cw(c2498.74,-764) DEx_GPIO_P0.9@2439.53,-764 ; DEx_GPIO_P0.9@2415,-778.53 cw(c2415,-813.6) 2439.8,-788.8 cw(c2464.6,-764) DEx_GPIO_P0.9@2429.53,-764
GPIO_0_9: DEx_GPIO_P0.10 SF_VIP_P0.14 | length 1307.9
  Top Layer w10: SF_VIP_P0.14@1960,-1360 2032,-1360 2084.53,-1307.47 2084.53,-1019.94 2390.47,-714 2465,-714 DEx_GPIO_P0.10@2515,-764 ; SF_VIP_P0.14@1970.27,-1370.27 cw(c1995.07,-1395.07) 1995.07,-1360 cw(c1995.07,-1324.93) SF_VIP_P0.14@1970.27,-1349.73 ; SF_VIP_P0.14@1977.34,-1377.34 cw(c2019.21,-1419.21) 2019.21,-1360 cw(c2019.21,-1300.79) SF_VIP_P0.14@1977.34,-1342.66 ; DEx_GPIO_P0.10@2490.47,-764 ccw(c2431.26,-764) 2473.13,-722.13 ccw(c2515,-680.26) DEx_GPIO_P0.10@2515,-739.47 ; DEx_GPIO_P0.10@2500.47,-764 ccw(c2465.4,-764) 2490.2,-739.2 ccw(c2515,-714.4) DEx_GPIO_P0.10@2515,-749.47
GPIO_0_10: DEx_GPIO_P0.13 SF_VIP_P0.15 | length 1184.4
  Bottom Layer w10: SF_VIP_P0.15@1860,-1460 1797.5,-1397.5 1797.5,-1140 1827.5,-1110 1985,-1110 2131,-964 DEx_GPIO_P0.13@2415,-964 ; DEx_GPIO_P0.13@2397.66,-981.34 ccw(c2355.79,-1023.21) 2355.79,-964 ccw(c2355.79,-904.79) DEx_GPIO_P0.13@2397.66,-946.66 ; DEx_GPIO_P0.13@2404.73,-974.27 ccw(c2379.93,-999.07) 2379.93,-964 ccw(c2379.93,-928.93) DEx_GPIO_P0.13@2404.73,-953.73
GPIO_0_11: DEx_GPIO_P0.14 SF_VIP_P0.16 | length 1597.3
  Top Layer w10: SF_VIP_P0.16@1960,-1460 2160,-1460 2212,-1408 2212,-942 2340,-814 2539,-814 2565,-840 2565,-914 DEx_GPIO_P0.14@2515,-964 ; SF_VIP_P0.16@1970.27,-1470.27 cw(c1995.07,-1495.07) 1995.07,-1460 cw(c1995.07,-1424.93) SF_VIP_P0.16@1970.27,-1449.73 ; SF_VIP_P0.16@1977.34,-1477.34 cw(c2019.21,-1519.21) 2019.21,-1460 cw(c2019.21,-1400.79) SF_VIP_P0.16@1977.34,-1442.66 ; DEx_GPIO_P0.14@2515,-949.47 ccw(c2515,-914.4) 2539.8,-939.2 ccw(c2564.6,-964) DEx_GPIO_P0.14@2529.53,-964 ; DEx_GPIO_P0.14@2515,-939.47 ccw(c2515,-880.26) 2556.87,-922.13 ccw(c2598.74,-964) DEx_GPIO_P0.14@2539.53,-964
GPIO_0_12: DEx_GPIO_P0.15 SF_VIP_P0.17 | length 1272.8
  Top Layer w10: SF_VIP_P0.17@1860,-1584.53 cw(c1860,-1643.74) 1901.87,-1601.87 cw(c1943.74,-1560) SF_VIP_P0.17@1884.53,-1560 ; SF_VIP_P0.17@1860,-1574.53 cw(c1860,-1609.6) 1884.8,-1584.8 cw(c1909.6,-1560) SF_VIP_P0.17@1874.53,-1560 ; SF_VIP_P0.17@1860,-1560 1910,-1610 2110.11,-1610 2238,-1482.11 2238,-1183.93 2285.47,-1136.45 2342.55,-1136.45 DEx_GPIO_P0.15@2415,-1064 ; DEx_GPIO_P0.15@2390.47,-1064 cw(c2331.26,-1064) 2373.13,-1105.87 cw(c2415,-1147.74) DEx_GPIO_P0.15@2415,-1088.53 ; DEx_GPIO_P0.15@2400.47,-1064 cw(c2365.4,-1064) 2390.2,-1088.8 cw(c2415,-1113.6) DEx_GPIO_P0.15@2415,-1078.53
GPIO_0_13: DEx_GPIO_P0.16 SF_VIP_P0.18 | length 1571.9
  Top Layer w10: SF_VIP_P0.18@1935.47,-1560 ccw(c1876.26,-1560) 1918.13,-1518.13 ccw(c1960,-1476.26) SF_VIP_P0.18@1960,-1535.47 ; SF_VIP_P0.18@1945.47,-1560 ccw(c1910.4,-1560) 1935.2,-1535.2 ccw(c1960,-1510.4) SF_VIP_P0.18@1960,-1545.47 ; SF_VIP_P0.18@1960,-1560 1910,-1510 1910,-1435 1935,-1410 2134,-1410 2161,-1383 v1(2161,-1014) ; v1@2150.39,-1024.61 cw(c2124.79,-1050.21) 2161,-1050.21 cw(c2197.21,-1050.21) v1@2171.61,-1024.61
  Bottom Layer w10: v1(2161,-1014) 2465,-1014 DEx_GPIO_P0.16@2515,-1064 ; v1@2171.61,-1024.61 cw(c2197.21,-1050.21) 2197.21,-1014 cw(c2197.21,-977.79) v1@2171.61,-1003.39 ; DEx_GPIO_P0.16@2490.47,-1064 ccw(c2431.26,-1064) 2473.13,-1022.13 ccw(c2515,-980.26) DEx_GPIO_P0.16@2515,-1039.47 ; DEx_GPIO_P0.16@2500.47,-1064 ccw(c2465.4,-1064) 2490.2,-1039.2 ccw(c2515,-1014.4) DEx_GPIO_P0.16@2515,-1049.47
GPIO_0_14: DEx_GPIO_P0.17 SF_VIP_P0.19 | length 1521.4
  Top Layer w10: SF_VIP_P0.19@1835.47,-1660 cw(c1776.26,-1660) 1818.13,-1701.87 cw(c1860,-1743.74) SF_VIP_P0.19@1860,-1684.53 ; SF_VIP_P0.19@1845.47,-1660 cw(c1810.4,-1660) 1835.2,-1684.8 cw(c1860,-1709.6) SF_VIP_P0.19@1860,-1674.53 ; SF_VIP_P0.19@1860,-1660 1810,-1710 1810,-1785 1835,-1810 2010,-1810 2289,-1531 2289,-1195.47 2320.47,-1164 DEx_GPIO_P0.17@2415,-1164 ; DEx_GPIO_P0.17@2397.66,-1181.34 ccw(c2355.79,-1223.21) 2355.79,-1164 ccw(c2355.79,-1104.79) DEx_GPIO_P0.17@2397.66,-1146.66 ; DEx_GPIO_P0.17@2404.73,-1174.27 ccw(c2379.93,-1199.07) 2379.93,-1164 ccw(c2379.93,-1128.93) DEx_GPIO_P0.17@2404.73,-1153.73
GPIO_0_15: DEx_GPIO_P0.18 SF_VIP_P0.20 | length 1056.9
  Bottom Layer w10: SF_VIP_P0.20@1960,-1660 2306,-1314 2547.5,-1314 2565,-1296.5 2565,-1214 DEx_GPIO_P0.18@2515,-1164 ; SF_VIP_P0.20@1960,-1645.47 ccw(c1960,-1610.4) 1984.8,-1635.2 ccw(c2009.6,-1660) SF_VIP_P0.20@1974.53,-1660 ; SF_VIP_P0.20@1960,-1635.47 ccw(c1960,-1576.26) 2001.87,-1618.13 ccw(c2043.74,-1660) SF_VIP_P0.20@1984.53,-1660
GPIO_0_16: DEx_GPIO_P0.19 SF_VIP_P0.21 | length 1276.3
  Bottom Layer w10: SF_VIP_P0.21@1860,-1760 1910,-1710 1910,-1335 1935,-1310 2273,-1310 2319,-1264 DEx_GPIO_P0.19@2415,-1264 ; SF_VIP_P0.21@1860,-1745.47 ccw(c1860,-1710.4) 1884.8,-1735.2 ccw(c1909.6,-1760) SF_VIP_P0.21@1874.53,-1760 ; SF_VIP_P0.21@1860,-1735.47 ccw(c1860,-1676.26) 1901.87,-1718.13 ccw(c1943.74,-1760) SF_VIP_P0.21@1884.53,-1760 ; DEx_GPIO_P0.19@2397.66,-1281.34 ccw(c2355.79,-1323.21) 2355.79,-1264 ccw(c2355.79,-1204.79) DEx_GPIO_P0.19@2397.66,-1246.66 ; DEx_GPIO_P0.19@2404.73,-1274.27 ccw(c2379.93,-1299.07) 2379.93,-1264 ccw(c2379.93,-1228.93) DEx_GPIO_P0.19@2404.73,-1253.73
GPIO_0_17: DEx_GPIO_P0.20 SF_VIP_P0.22 | length 1524.8
  Top Layer w10: v1(2145,-1760) 2351,-1554 v1(2351,-1214) ; v1@2145,-1745 ccw(c2145,-1708.79) 2170.61,-1734.39 ccw(c2196.21,-1760) v1@2160,-1760 ; v1@2340.39,-1224.61 cw(c2314.79,-1250.21) 2351,-1250.21 cw(c2387.21,-1250.21) v1@2361.61,-1224.61
  Bottom Layer w10: SF_VIP_P0.22@1960,-1760 v1(2145,-1760) ; SF_VIP_P0.22@1970.27,-1770.27 cw(c1995.07,-1795.07) 1995.07,-1760 cw(c1995.07,-1724.93) SF_VIP_P0.22@1970.27,-1749.73 ; SF_VIP_P0.22@1977.34,-1777.34 cw(c2019.21,-1819.21) 2019.21,-1760 cw(c2019.21,-1700.79) SF_VIP_P0.22@1977.34,-1742.66 ; v1@2134.39,-1770.61 ccw(c2108.79,-1796.21) 2108.79,-1760 ccw(c2108.79,-1723.79) v1@2134.39,-1749.39 ; v1(2351,-1214) 2465,-1214 DEx_GPIO_P0.20@2515,-1264 ; v1@2361.61,-1224.61 cw(c2387.21,-1250.21) 2387.21,-1214 cw(c2387.21,-1177.79) v1@2361.61,-1203.39 ; DEx_GPIO_P0.20@2490.47,-1264 ccw(c2431.26,-1264) 2473.13,-1222.13 ccw(c2515,-1180.26) DEx_GPIO_P0.20@2515,-1239.47 ; DEx_GPIO_P0.20@2500.47,-1264 ccw(c2465.4,-1264) 2490.2,-1239.2 ccw(c2515,-1214.4) DEx_GPIO_P0.20@2515,-1249.47
GPIO_0_18: DEx_GPIO_P0.21 SF_VIP_P0.23 | length 1108.7
  Bottom Layer w10: SF_VIP_P0.23@1860,-1860 1910,-1810 2210,-1810 2263,-1757 2263,-1478.79 2377.79,-1364 ; SF_VIP_P0.23@1860,-1845.47 ccw(c1860,-1810.4) 1884.8,-1835.2 ccw(c1909.6,-1860) SF_VIP_P0.23@1874.53,-1860 ; SF_VIP_P0.23@1860,-1835.47 ccw(c1860,-1776.26) 1901.87,-1818.13 ccw(c1943.74,-1860) SF_VIP_P0.23@1884.53,-1860 ; DEx_GPIO_P0.21@2392.46,-1373.67 ccw(c2377.79,-1379.96) 2377.79,-1364 ; DEx_GPIO_P0.21@2392.46,-1354.33 cw(c2377.79,-1348.04) 2377.79,-1364 ; DEx_GPIO_P0.21@2415,-1364 2377.79,-1364
GPIO_0_19: DEx_GPIO_P0.22 SF_VIP_P0.24 | length 1217.2
  Bottom Layer w10: SF_VIP_P0.24@1960,-1860 2220,-1860 2288,-1792 2288,-1518 2391.53,-1414.47 2464.53,-1414.47 DEx_GPIO_P0.22@2515,-1364 ; SF_VIP_P0.24@1970.27,-1870.27 cw(c1995.07,-1895.07) 1995.07,-1860 cw(c1995.07,-1824.93) SF_VIP_P0.24@1970.27,-1849.73 ; SF_VIP_P0.24@1977.34,-1877.34 cw(c2019.21,-1919.21) 2019.21,-1860 cw(c2019.21,-1800.79) SF_VIP_P0.24@1977.34,-1842.66 ; DEx_GPIO_P0.22@2490.47,-1364 cw(c2431.26,-1364) 2473.13,-1405.87 cw(c2515,-1447.74) DEx_GPIO_P0.22@2515,-1388.53 ; DEx_GPIO_P0.22@2500.47,-1364 cw(c2465.4,-1364) 2490.2,-1388.8 cw(c2515,-1413.6) DEx_GPIO_P0.22@2515,-1378.53
GPIO_0_20: DEx_GPIO_P0.23 SF_VIP_P0.25 | length 1088.1
  Bottom Layer w10: SF_VIP_P0.25@1860,-1960 1910,-1910 2260,-1910 2313,-1857 2313,-1578.31 2325.31,-1566 2325.31,-1538.13 2373.97,-1489.47 2389.53,-1489.47 DEx_GPIO_P0.23@2415,-1464 ; SF_VIP_P0.25@1860,-1945.47 ccw(c1860,-1910.4) 1884.8,-1935.2 ccw(c1909.6,-1960) SF_VIP_P0.25@1874.53,-1960 ; SF_VIP_P0.25@1860,-1935.47 ccw(c1860,-1876.26) 1901.87,-1918.13 ccw(c1943.74,-1960) SF_VIP_P0.25@1884.53,-1960
GPIO_0_21: DEx_GPIO_P0.24 SF_VIP_P0.26 | length 1093.7
  Bottom Layer w10: SF_VIP_P0.26@1960,-1960 1984,-1936 2284,-1936 2338,-1882 2338,-1601 2351,-1588 2351,-1553 2389.53,-1514.47 2464.53,-1514.47 DEx_GPIO_P0.24@2515,-1464 ; DEx_GPIO_P0.24@2490.47,-1464 cw(c2431.26,-1464) 2473.13,-1505.87 cw(c2515,-1547.74) DEx_GPIO_P0.24@2515,-1488.53 ; DEx_GPIO_P0.24@2500.47,-1464 cw(c2465.4,-1464) 2490.2,-1488.8 cw(c2515,-1513.6) DEx_GPIO_P0.24@2515,-1478.53
GPIO_0_22: DEx_GPIO_P0.25 SF_VIP_P0.27 | length 1246.7
  Bottom Layer w10: SF_VIP_P0.27@1860,-2060 1910,-2010 1988,-2010 2036,-1962 2341.47,-1962 2363,-1940.47 2363,-1616 DEx_GPIO_P0.25@2415,-1564 ; SF_VIP_P0.27@1860,-2045.47 ccw(c1860,-2010.4) 1884.8,-2035.2 ccw(c1909.6,-2060) SF_VIP_P0.27@1874.53,-2060 ; SF_VIP_P0.27@1860,-2035.47 ccw(c1860,-1976.26) 1901.87,-2018.13 ccw(c1943.74,-2060) SF_VIP_P0.27@1884.53,-2060 ; DEx_GPIO_P0.25@2390.47,-1564 cw(c2331.26,-1564) 2373.13,-1605.87 cw(c2415,-1647.74) DEx_GPIO_P0.25@2415,-1588.53 ; DEx_GPIO_P0.25@2400.47,-1564 cw(c2365.4,-1564) 2390.2,-1588.8 cw(c2415,-1613.6) DEx_GPIO_P0.25@2415,-1578.53
GPIO_0_23: DEx_GPIO_P0.26
GPIO_0_24: DEx_GPIO_P0.27 SF_VIP_P2.5 | length 3419.8
  Top Layer w10: SF_VIP_P2.5@622.66,-312.34 cw(c580.79,-354.21) 640,-354.21 cw(c699.21,-354.21) SF_VIP_P2.5@657.34,-312.34 ; v1@629.39,-1076.39 ccw(c603.79,-1050.79) 640,-1050.79 ccw(c676.21,-1050.79) v1@650.61,-1076.39 ; SF_VIP_P2.5@629.73,-305.27 cw(c604.93,-330.07) 640,-330.07 cw(c675.07,-330.07) SF_VIP_P2.5@650.27,-305.27 ; v1(640,-1087) SF_VIP_P2.5@640,-295 ; v1(1795,-1910) 2072,-1910 2318,-1664 DEx_GPIO_P0.27@2415,-1664 ; v1@1805.61,-1920.61 cw(c1831.21,-1946.21) 1831.21,-1910 cw(c1831.21,-1873.79) v1@1805.61,-1899.39 ; DEx_GPIO_P0.27@2397.66,-1681.34 ccw(c2355.79,-1723.21) 2355.79,-1664 ccw(c2355.79,-1604.79) DEx_GPIO_P0.27@2397.66,-1646.66 ; DEx_GPIO_P0.27@2404.73,-1674.27 ccw(c2379.93,-1699.07) 2379.93,-1664 ccw(c2379.93,-1628.93) DEx_GPIO_P0.27@2404.73,-1653.73
  Bottom Layer w10: v1(640,-1087) 972,-1087 v1(1795,-1910)
GPIO_0_25: DEx_GPIO_P0.28 SF_VIP_P2.6 | length 4414
  Top Layer w10: SF_VIP_P2.6@640,-219.53 cw(c640,-278.74) 681.87,-236.87 cw(c723.74,-195) SF_VIP_P2.6@664.53,-195 ; SF_VIP_P2.6@640,-209.53 cw(c640,-244.6) 664.8,-219.8 cw(c689.6,-195) SF_VIP_P2.6@654.53,-195 ; SF_VIP_P2.6@640,-195 690,-245 v1(690,-1373) ; v1@679.39,-1362.39 ccw(c653.79,-1336.79) 690,-1336.79 ccw(c726.21,-1336.79) v1@700.61,-1362.39
  Bottom Layer w10: v1(690,-1373) 1702,-2385 2486,-2385 2590,-2281 2590,-1739 DEx_GPIO_P0.28@2515,-1664